# Altium PCB PCB_Mach_DK_Relay_3_Kenh.PcbDoc
Units mil, origin at the board's own origin, x right, y up, seen from the top; angles counter-clockwise.
Board outline 3770 x 1970 mil, 2 copper layers (Top Layer, Bottom Layer); 37 components, 33 nets, 125 pads, 2 vias.
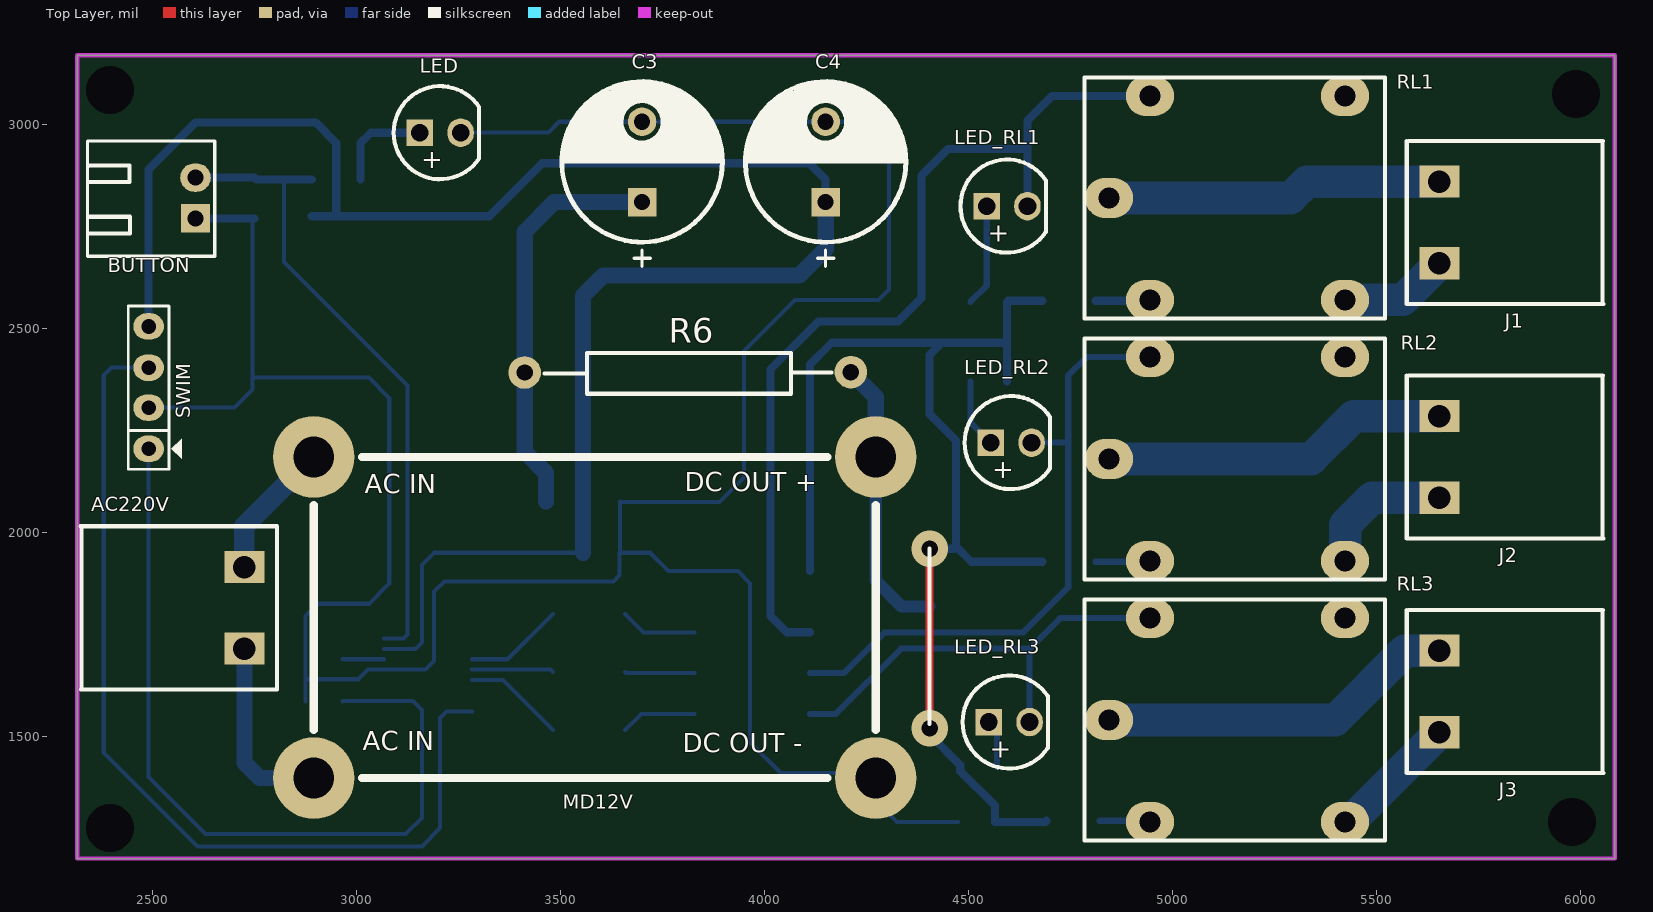
[diagram p0: Top Layer view]
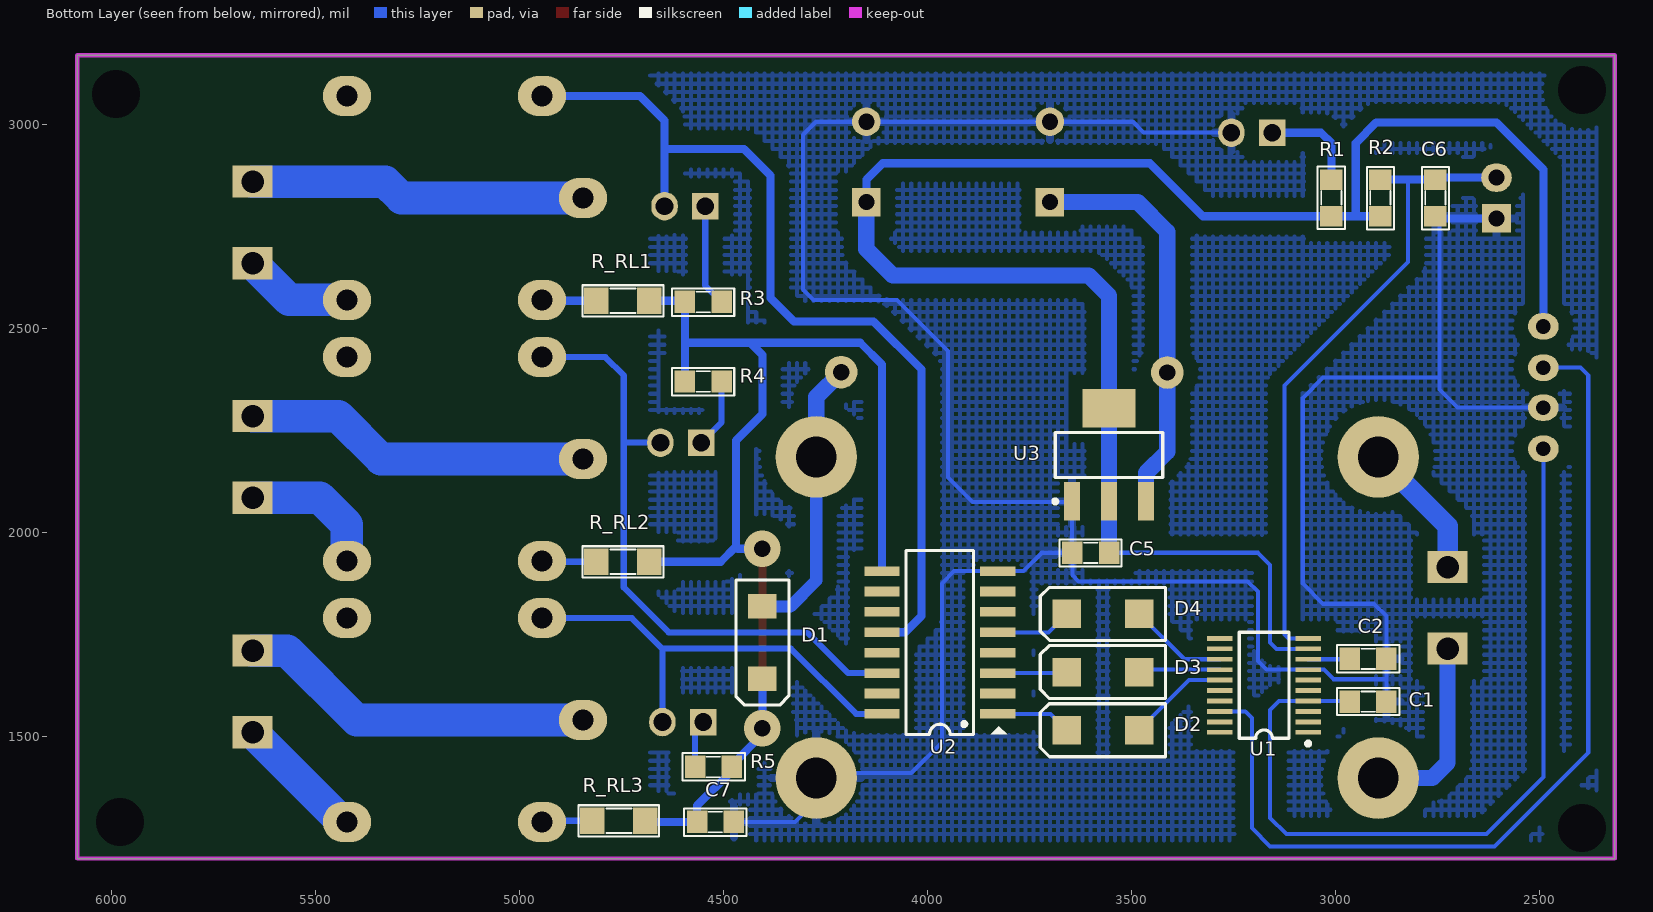
[diagram p1: Bottom Layer view, seen from below]

## Layer stack, top to bottom
Top Solder: solder mask 0.4, Solder Resist, Dk 3.5
Top Layer: signal copper 1.4
Dielectric 1: dielectric 12.6, FR-4, Dk 4.8
Bottom Layer: signal copper 1.4
Bottom Solder: solder mask 0.4, Solder Resist, Dk 3.5

## Board outline
2315,1200 6085,1200 6085,3170 2315,3170

## Design rules (kind name [scope] priority, off if disabled: settings)
Clearance [All] p1: gap=35
PolygonConnect [All] p1: connectstyle=Relief reliefconductorwidth=20 reliefentries=4 polygonreliefangle="90 Angle" airgapwidth=10
RoutingVias [All] p1: holewidth=20 width=40 viastyle="Through Hole" minholewidth=20 minwidth=40 maxholewidth=20 maxwidth=40
SolderMaskExpansion [All] p1: expansion=4
Width [All] p1: maxlimit=100 minlimit=10 preferedwidth=10
30 further rules are at their usual default settings.

## Components (designator, comment, footprint, x,y, rotation, side; value= is the part's Value field where it differs from the comment)
AC220V "POWER" "BIG_Header 2" 2725,1715 r90 top
BUTTON "Header 2" "Header 2 Duc Cong 2.54" 2605,2770 r270 top
C1 "104" "Tu 0805" 2920,1585 r0 bottom
C2 "105" "Tu 0805" 2920,1690 r0 bottom
C3 "470uF/35V" "Tu Hoa 450uF - 16V" 3695,2900 r90 top
C4 "470uF/35V" "Tu Hoa 450uF - 16V" 4145,2900 r90 top
C5 "104" "Tu 0805" 3600,1950 r180 bottom
C6 "104" "Tu 0805" 2755,2820 r90 bottom
C7 "105" "Tu 0805" 4520,1290 r180 bottom
D1 "M7" SMB#1 4405,1730 r90 bottom
D2 "M7" SMB#2 3570,1515 r180 bottom
D3 "M7" SMB#2 3570,1657.5 r180 bottom
D4 "M7" SMB#2 3570,1800 r180 bottom
J1 "Header 2" "BIG_Header 2" 5655,2860 r270 top
J2 "Header 2" "BIG_Header 2" 5655,2285 r270 top
J3 "Header 2" "BIG_Header 2" 5655,1710 r270 top
LED "LED3" "LED RED 5mm" 3205,2980 r0 top
LED_RL1 "LED3" "LED RED 5mm" 4595,2800 r0 top
LED_RL2 "LED3" "LED RED 5mm" 4605,2220 r0 top
LED_RL3 "LED3" "LED RED 5mm" 4600,1535 r0 top
MD12V "Module Driver LED 1x3W" "Module Driver LED" 2895,2185 r0 top
R1 "1k" "Tro SMD 0805" 3010,2820 r270 bottom
R2 "10k" "Tro SMD 0805" 2890,2820 r90 bottom
R3 "4.7k" "Tro SMD 0805" 4550,2565 r180 bottom
R4 "4.7k" "Tro SMD 0805" 4550,2370 r180 bottom
R5 "4.7k" "Tro SMD 0805" 4525,1425 r0 bottom
R6 "1" R2W 3815,2390 r180 top
R_RL1 "100" "1206 SMD" 4745,2565 r0 bottom
R_RL2 "100" "1206 SMD" 4745,1925 r0 bottom
R_RL3 "100" "1206 SMD" 4755,1290 r0 bottom
RL1 "Relay ?V - 10A" RELAY5PIN-10A 4845,2820 r270 top
RL2 "Relay ?V - 10A" RELAY5PIN-10A 4845,2180 r270 top
RL3 "Relay ?V - 10A" RELAY5PIN-10A 4845,1540 r270 top
SWIM "JP4" JP4 2490,2305 r90 top
U1 "STM8S003F3 UFQFPN20P" TSSOP20 3175,1625 r90 bottom
U2 "ULN2003A" SOP16 3970,1730 r90 bottom
U3 "AMS1117-5V" SOT223-4N 3555,2190 r90 bottom

## Footprints (in the part's own frame and the unit in brackets; to place one, negate y for a bottom-side part, rotate by r counter-clockwise, add the part's x,y. Pads: shape width x height; smd on the part's side, far side on the other; paste and mask are expansions set on the pad)
"1206 SMD" [mil]
  rect 60x65 smd: 1(-63,-3) 2(67,-3)
  silkscreen extent -97,-41 101,36, body extent -81,-38 85,33, height 25
"BIG_Header 2" [mm]
  rect 2x2.5 hole 1.4: 1(0,0) 2(5.08,0)
  silkscreen extent -2.54,-2.03 7.62,10.21, body extent -2.5,-1.75 7.58,10.25, height 3.15
"Header 2 Duc Cong 2.54" [mil]
  rect 70x70 hole 39.37 unplated: 1(0,0)
  oval 70x75 hole 39.37 unplated: 2(-100,0)
  silkscreen extent -190,-265 93,47
JP4 [mil] "Jumper 4"
  oval 65x75 hole 36: 1(-100,0) 2(1,0) 3(99,0) 4(200,0)
  silkscreen extent -150,-81 250,50, body extent -148,-48 248,50, height 323
"LED RED 5mm" [mil] "LED phi 5mm"
  rect 65x65 hole 43.31: 1(-50,0)
  oval 65x70 hole 43.31: 2(50,0)
  silkscreen extent -114,-114 95,114, body extent -118,-118 98,118, height 353
"Module Driver LED" [mm]
  round 5.08 hole 2.54: 1(0,0) 2(0,-20) 3(35,0) 4(35,-20)
  silkscreen extent 0,-20 35,0
R2W [mil] "dien tro 2W"
  round 80 hole 40: 1(-397,-3) 2(403,-2)
  silkscreen extent -349,-50 354,50, body extent -414,-110 414,107, height 217
RELAY5PIN-10A [mm]
  oval 2.5x3 hole 1.3: 1(0,0) 2(-6.35,14.7) 3(6.35,14.7) 4(-6.35,2.54) 5(6.35,2.54)
  silkscreen extent -7.49,-1.52 7.51,17.18, body extent -7.49,-1.52 7.49,17.14, height 16
SMB#1 [mil]
  rect 60x70 smd: 1(88.58,0) 2(-88.58,0)
  silkscreen extent -154,-65 154,65, body extent -102,-51 102,51, height 95
SMB#2 [mil]
  rect 70x70 smd: 1(88.58,0) 2(-88.58,0)
  silkscreen extent -154,-65 154,65, body extent -102,-51 102,51, height 95
SOP16 [mm] "Small Outline; 16 Leads; Body Width 5.6 mm; Pitch 1.27 mm"
  rect 0.6x2.2 smd: 1(-4.445,-3.6) 2(-3.175,-3.6) 3(-1.905,-3.6) 4(-0.635,-3.6) 5(0.635,-3.6) 6(1.905,-3.6) 7(3.175,-3.6) 8(4.445,-3.6) 9(4.445,3.6) 10(3.175,3.6) 11(1.905,3.6) 12(0.635,3.6) 13(-0.635,3.6) 14(-1.905,3.6) 15(-3.175,3.6) 16(-4.445,3.6)
  silkscreen extent -5.73,-4.19 5.73,2.1, body extent -5.22,-3.63 5.08,3.37, height 2.1
SOT223-4N [mm] "SOT223, 4-Leads, Body 6.5x3.5mm, Pitch 2.3mm, Lead Span 7mm, IPC Medium Density"
  rect 2.4x1 smd: 1(-2.9,2.3) 2(-2.9,0) 3(-2.9,-2.3)
  rect 2.4x3.3 smd: 4(2.9,0)
  silkscreen extent -3.02,-3.35 1.4,3.48, body extent -3.39,-3.27 3.5,3.23, height 1.72
"Tro SMD 0805" [mil]
  rect 50x55 smd: 1(-45,0) 2(45,0)
  silkscreen extent -77,-34 76,33, body extent -62,-28 56,27, height 21
TSSOP20 [mm] "Shrink Small Outline; 20 Leads; Body Width 4.4 mm; Pitch 0.65 mm"
  rect 0.3x1.6 smd: 1(-2.925,-2.75) 2(-2.275,-2.75) 3(-1.625,-2.75) 4(-0.975,-2.75) 5(-0.325,-2.75) 6(0.325,-2.75) 7(0.975,-2.75) 8(1.625,-2.75) 9(2.275,-2.75) 10(2.925,-2.75) 11(2.925,2.75) 12(2.275,2.75) 13(1.625,2.75) 14(0.975,2.75) 15(0.325,2.75) 16(-0.325,2.75) 17(-0.975,2.75) 18(-1.625,2.75) 19(-2.275,2.75) 20(-2.925,2.75)
  silkscreen extent -3.75,-2.87 3.3,1.55, body extent -3.3,-3.3 3.3,3.3, height 1.12
"Tu 0805" [mil] "Compoment SMD 80x50mil"
  rect 50x55 smd: 1(-45,0) 2(45,0)
  silkscreen extent -77,-34 76,33, body extent -40,-27 40,23, height 24
"Tu Hoa 450uF - 16V" [mil]
  rect 70x70 hole 39.37 unplated: 1(-90,-5)
  round 70 hole 39.37 unplated: 2(106.85,-5)
  silkscreen extent -248,-202 205,192, body extent -190,-203 207,192, height 556

## Part data
AC220V: library part "Header 2", "Big Header 2"
BUTTON: library part Hed2, "Header 2 (Green)"
C1 C2 C5 C6 C7: library part "CAP 0805"
C3 C4: library part "Cap100uF 50V"
D1 D2 D3 D4: library part DIODE, "Diode"
J1 J2 J3: "Big Header 2"
LED LED_RL1 LED_RL2 LED_RL3: library part "LED 3mm", "LED 3mm"
MD12V: library part "Module DK LED 1X3w"
R1 R2 R3 R4 R5: library part Res, "Resistor 1/4W"
R6: library part R2W, "Resistor 2W"
R_RL1 R_RL2 R_RL3: library part R1/4W, "Resistor 1/4W"
RL1 RL2 RL3: library part "Relay 10A", "Relay SPDT,10A - 12VDC 5 Pin"
U2: "High-Voltage, High-Current Darlington Array"
U3: library part AMS1117, "AMS"

## Free pads (board coordinates)
  round 78.74 hole 118.11: 0(5980,1290) 1(5990,3075) 2(2395,1275) 3(2395,3085)

## Via types
v1: diameter 90, hole 40, Top Layer to Bottom Layer, 1 vias
v2: diameter 90, hole 40, Top Layer to Bottom Layer, tented top, 1 vias

## Nets (pads, with @x,y where several pads share a name; then routed paths per layer and width w, separated by ;. In a path a pad name is that pad's centre, name@x,y a point inside that pad or via, vN(x,y) a via of type N, cw(c..) or ccw(c..) an arc to the next point about the centre after c; other vN are vias at no path point)
12V: D1.1 MD12V.3 R6.1 | length 694.5
  Bottom Layer w30: MD12V.3 4272.95,1882.05 4336.42,1818.58 D1.1
  Bottom Layer w40: R6.1 4272.95,2332.05 MD12V.3
BUTTON: BUTTON.2 C6.2 R2.2 U1.10 | length 1589.7
  Bottom Layer w10: 2822.5,2865 2822.5,2662.5 3125,2360 3125,1750 3115.16,1740.16 U1.10
  Bottom Layer w20: BUTTON.2 2750,2870 C6.2 2822.5,2865 R2.2
GND: BUTTON.1 C1.1 C2.1 C3.2 C4.2 C5.1 C6.1 C7.2 LED.2 MD12V.4 SWIM.2 U1.7 U2.8 U3.1 | length 7061.4
  Bottom Layer w10: SWIM.2 2701,2306 2745,2350 2745,2380 ; C6.1@2750,2770 2745,2765 2745,2380 ; C1.1 2875,1640 ; LED.2 3470,2980 3496.85,3006.85 C3.2 4273.15,3006.85 4305,2975 4305,2595 4280,2570 4075,2570 3950,2445 3950,2135 3890,2075 3646.38,2075 U3.1 3645.55,1950.55 C5.1 ; MD12V.4 4260.55,1410 4040,1410 3965,1485 3965,1875 3935,1905 U2.8 3765,1905 3720,1950 C5.1 ; MD12V.4@4282.95,1332.6 4325.55,1290 C7.2 ; 2745,2380 3030,2380 3080,2330 3080,1875 3030,1825 2905,1825 2875,1795 C2.1 2875,1640 ; 2875,1640 3005,1640 3028.39,1663.39 U1.7 3168.39,1663.39 3190,1685 3190,1855 3215,1880 3630,1880 3645,1895 C5.1
  Bottom Layer w20: BUTTON.1 C6.1@2750,2770
L: AC220V.1 MD12V.2 | length 518.5
  Bottom Layer w40: AC220V.1 2725,1435 2762.4,1397.6 MD12V.2 ; MD12V.2@2867.5,1370.1 MD12V.2@2905,1332.6
N: AC220V.2 MD12V.1 | length 340.4
  Bottom Layer w50: AC220V.2 2725,2015 MD12V.1
NetC3_1: C3.1 R6.2 U3.3 | length 1001.1
  Bottom Layer w40: U3.3 3464.45,2145.55 3412,2198 R6.2 3412,2737 3485,2810 C3.1
NetC7_1: C7.1 D1.2 R3.1 R4.1 R5.1 R_RL1.1 R_RL2.1 R_RL3.1 U2.9 | length 3122.1
  Top Layer w20: v2(4405,1520) 4405,1955 4410,1960 v1(4405,1960)
  Bottom Layer w20: U2.9 4111.73,2411.73 4165,2465 4435,2465 ; D1.2 v2(4405,1520) 4405,1505 4480,1430 R5.1 4480,1415 4565,1330 C7.1 4689,1290 R_RL3.1 ; v1(4405,1960) 4465,1960 4470,1965 ; R4.1 4595,2465 ; R_RL2.1 4507,1928 4470,1965 ; R_RL1.1 4598,2568 R3.1 4595,2465 ; 4435,2465 4595,2465 ; 4435,2465 4405,2435 4405,2290 4470,2225 4470,1965
NetD2_2: D2.2 U2.1 | length 186.3
  Bottom Layer w10: D2.2 3698.58,1555 U2.1
NetD3_2: D3.2 U2.3 | length 170.7
  Bottom Layer w10: D3.2 3661.08,1655 U2.3
NetD4_2: D4.2 U2.5 | length 188.3
  Bottom Layer w10: D4.2 3703.58,1755 U2.5
NetJ1_1: J1.1 RL1.1 | length 826.6
  Bottom Layer w80: RL1.1 5290,2820 5330,2860 J1.1
NetJ1_2: J1.2 RL1.3 | length 268.5
  Bottom Layer w80: RL1.3 5565,2570 J1.2
NetJ2_1: J2.1 RL2.1 | length 853.5
  Bottom Layer w80: RL2.1 5340,2180 5445,2285 J2.1
NetJ2_2: J2.2 RL2.3 | length 347.4
  Bottom Layer w80: RL2.3 5423.74,2018.74 5490,2085 J2.2
NetJ3_1: J3.1 RL3.1 | length 880.4
  Bottom Layer w80: RL3.1 5400,1540 5570,1710 J3.1
NetJ3_2: J3.2 RL3.3 | length 322.4
  Bottom Layer w80: RL3.3 5435,1290 J3.2
NetLED_1: LED.1 R1.1 | length 245.4
  Bottom Layer w20: R1.1 3010,2955 3035,2980 LED.1
NetLED_RL1_1: LED_RL1.1 R3.2 | length 251.6
  Bottom Layer w15: R3.2 4545,2605 LED_RL1.1
NetLED_RL2_1: LED_RL2.1 R4.2 | length 170.7
  Bottom Layer w15: R4.2 4505,2270 LED_RL2.1
NetLED_RL3_1: LED_RL3.1 R5.2 | length 118.3
  Bottom Layer w15: LED_RL3.1 4570,1515 R5.2
NetR_RL1_2: R_RL1.2 RL1.5 | length 133.8
  Bottom Layer w20: R_RL1.2 4943,2568 RL1.5
NetR_RL2_2: R_RL2.2 RL2.5 | length 133.8
  Bottom Layer w15: R_RL2.2 4943,1928 RL2.5
NetR_RL3_2: R_RL3.2 RL3.5 | length 124.2
  Bottom Layer w15: R_RL3.2 4942,1293 RL3.5
RL1: LED_RL1.2 RL1.4 U2.12 | length 2282.6
  Bottom Layer w20: U2.12 4055,1755 4015,1795 4015,2400 4132.5,2517.5 4327.5,2517.5 4385,2575 4385,2875 4450,2940 4645,2940 ; LED_RL1.2 4645,2940 ; RL1.4 4705,3070 4645,3010 4645,2940
RL2: LED_RL2.2 RL2.4 U2.14 | length 1548.9
  Bottom Layer w15: U2.14 4195,1655 4295,1755 4635,1755 4745,1865 4745,2220 ; LED_RL2.2 4745,2220 ; RL2.4 4790,2430 4745,2385 4745,2220
RL3: LED_RL3.2 RL3.4 U2.16 | length 1110.6
  Bottom Layer w15: U2.16 4175,1555 4335,1715 4650,1715 ; LED_RL3.2 4650,1715 ; RL3.4 4725,1790 4650,1715
RL_1: D2.1 U1.15 | length 249
  Bottom Layer w10: U1.15 3358.62,1637.8 D2.1
RL_2: D3.1 U1.14 | length 200.6
  Bottom Layer w10: U1.14 3475.53,1663.39 D3.1
RL_3: D4.1 U1.13 | length 244.1
  Bottom Layer w10: U1.13 3370.39,1688.98 D4.1
RST: C1.2 SWIM.1 U1.4 | length 2019.2
  Bottom Layer w10: SWIM.1 2490,1400 2630,1260 3120,1260 3160,1300 3160,1565 3138.39,1586.61 U1.4 2966.61,1586.61 C1.2
SWIM: SWIM.3 U1.18 | length 2336.7
  Bottom Layer w10: SWIM.3 2399,2404 2380,2385 2380,1460 2610,1230 3160,1230 3205,1275 3205,1545 3221.02,1561.02 U1.18
VCAP: C2.2 U1.8 | length 102.2
  Bottom Layer w10: C2.2 2966.02,1688.98 U1.8
VCC: C4.1 C5.2 R1.2 R2.1 SWIM.4 U1.9 U3.2 U3.4 | length 4563.5
  Bottom Layer w10: U1.9 3144.57,1714.57 3160,1730 3160,1920 3190,1950 C5.2
  Bottom Layer w20: SWIM.4 2490,2890 2605,3005 2900,3005 2950,2955 2950,2775 ; R2.1 2950,2775 ; C4.1@4150,2815 4150,2865 4110,2905 3455,2905 3325,2775 R1.2 2950,2775
  Bottom Layer w40: C5.2 U3.2 U3.4 3555,2580 3605,2630 4085,2630 4150,2695 C4.1@4150,2815
pads on no net: RL1.2 RL2.2 RL3.2 U1.1 U1.2 U1.3 U1.5 U1.6 U1.11 U1.12 U1.16 U1.17 U1.19 U1.20 U2.2 U2.4 U2.6 U2.7 U2.10 U2.11 U2.13 U2.15

## Polygon pours and split planes (outlines as drawn)
GND on Bottom Layer "Top Layer-No Net" (hatched 90Degree grid 20 track 10, pour order 3): 2315,3170 4680,3170 4680,1200 2315,1200

## Keep-outs
Keep-Out Layer:
  the board outline again, w10

## Silkscreen, mask and mechanical layers (free items; w line width, h text height)
Top Overlay:
  lines w10: 4405,1530 4405,1960

## Text inside footprints (layer, text, board x,y; h text height)
LED: Top Overlay "+" at 3158,2877 h80
LED_RL1: Top Overlay "+" at 4548,2697 h80
LED_RL2: Top Overlay "+" at 4558,2117 h80
LED_RL3: Top Overlay "+" at 4553,1432 h80
MD12V: Top Overlay "DC OUT -" at 3800,1445 h80; Top Overlay "DC OUT +" at 3805,2085 h80; Top Overlay "AC IN" at 3015,1450 h80; Top Overlay "AC IN" at 3020,2080 h80